# Altium PCB Kaplan.PcbDoc
Units mm, origin at the board's own origin, x right, y up, seen from the top; angles counter-clockwise.
Board outline 50 x 50 mm, 2 copper layers (Top Layer, Bottom Layer), stack 1.071 mm thick; 2 components, 0 nets, 209 pads, 0 vias.
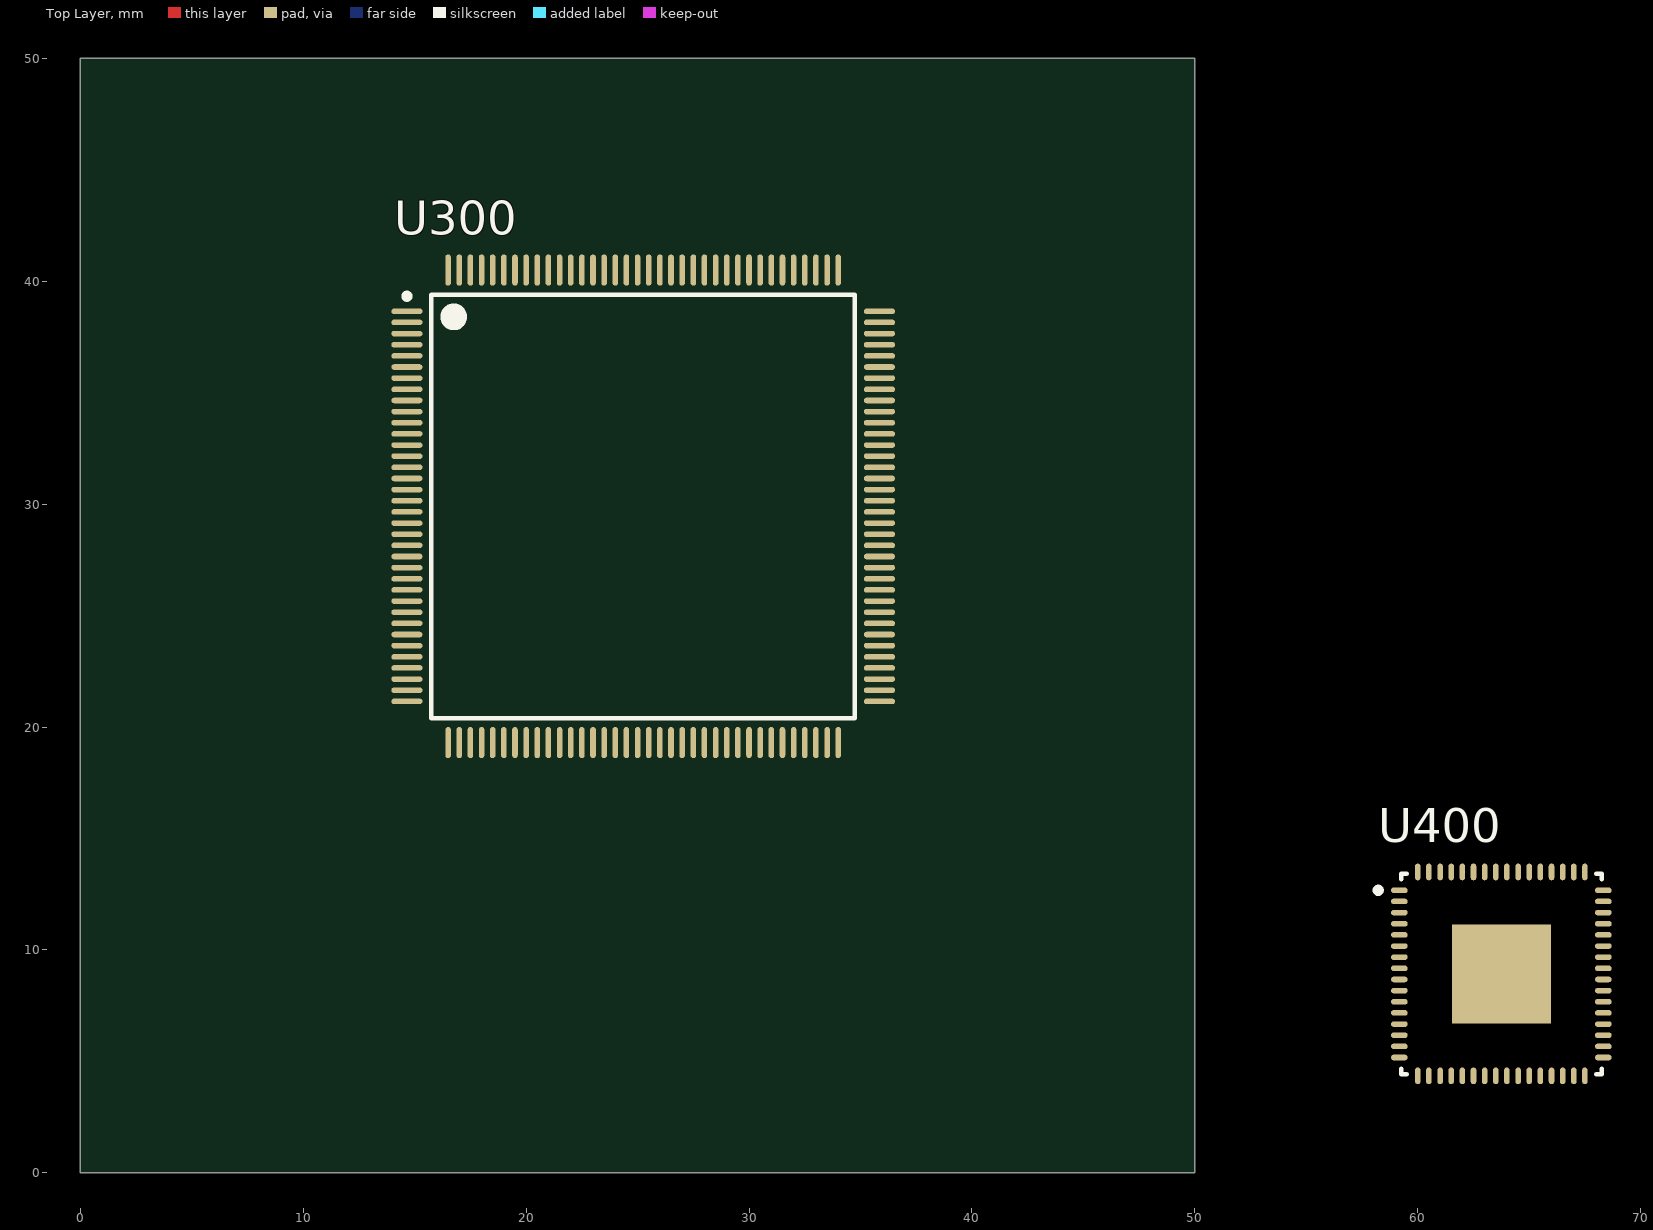
[diagram p0: Top Layer view]
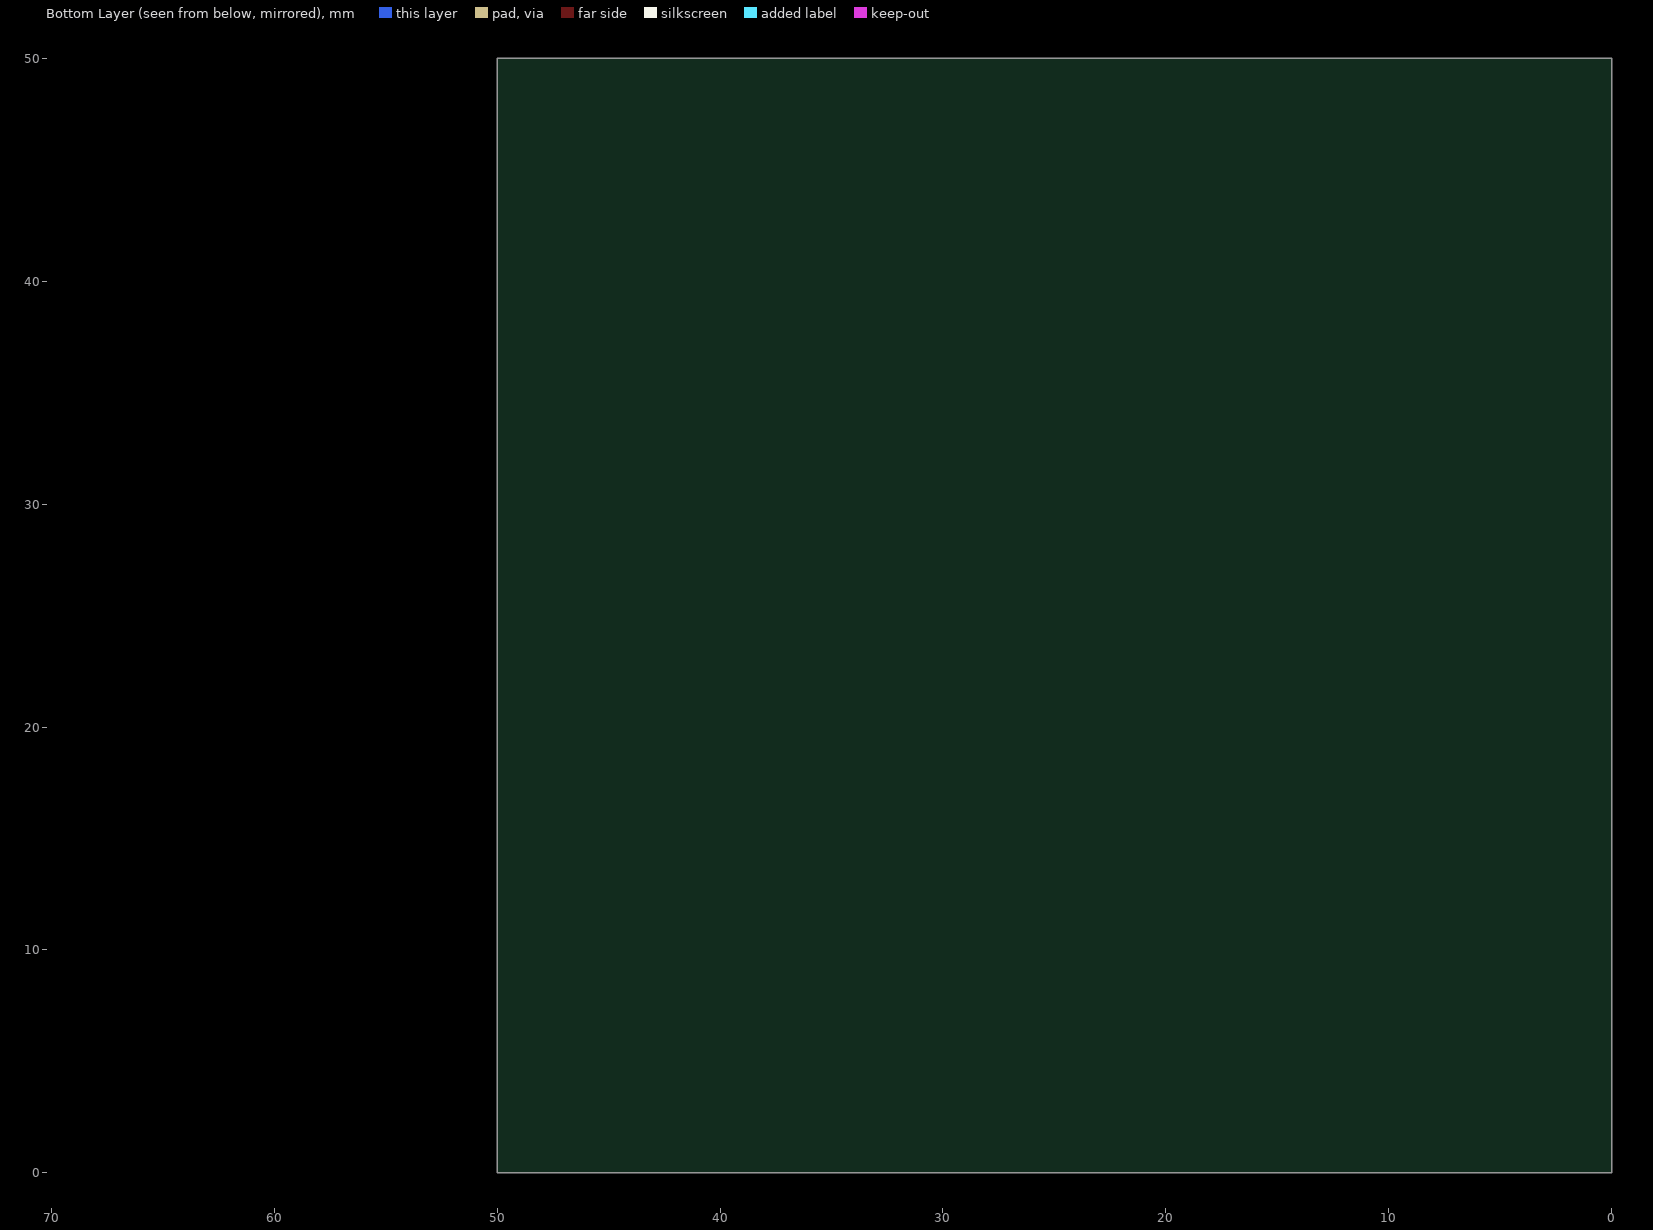
[diagram p1: Bottom Layer view, seen from below]

## Layer stack, top to bottom
Top Solder: solder mask 0.0102, Solder Resist, Dk 3.5
Top Layer: signal copper 0.0356
Dielectric1: core 1, FR-4, Dk 4.8
Bottom Layer: signal copper 0.0356
Bottom Solder: solder mask 0.0102, Solder Resist, Dk 3.5

## Board outline
0,0 0,50 50,50 50,0

## Design rules (kind name [scope] priority, off if disabled: settings)
AssemblyTestPointUsage [All] p1 off:
AssemblyTestpoint [All] p1 off: testpointundercomponent=TRUE minsize=1.016 maxsize=2.54 preferedsize=1.524 minholesize=0 maxholesize=1.016 preferedholesize=0.813 testpointgrid=0.025 usegrid=TRUE gridtolerance=0 allowsidetop=TRUE allowsidebottom=TRUE
BoardOutlineClearance [All] p1: gap=0.2 ignorepadtopadclearanceinfootprint=FALSE
Clearance Clearance_Polygon [InNamedPolygon('Top-GND') vs not (istrack and OnLayer('Keep-Out Layer'))] p1: gap=0.254 ignorepadtopadclearanceinfootprint=FALSE except(0: Arc-Hole Track-Hole SMDPad-Hole THPad-Hole Via-Hole Fill-Hole Poly-Hole Region-Hole Text-Hole)
Clearance [All] p2: gap=0.15 ignorepadtopadclearanceinfootprint=FALSE except(0: Arc-Hole Track-Hole SMDPad-Hole THPad-Hole Via-Hole Fill-Hole Poly-Hole Region-Hole Text-Hole)
ComponentClearance [All] p1 off: gap=0.254 collisioncheckmode=3 verticalgap=0.254 showdistances=FALSE
FabricationTestPointUsage [All] p1 off: valid=0 allowmultiple=FALSE
FabricationTestpoint [All] p1 off: side=3 testpointundercomponent=TRUE minsize=1.016 maxsize=2.54 preferedsize=1.524 minholesize=0 maxholesize=1.016 preferedholesize=0.813 testpointgrid=0.025 allowsidetop=TRUE allowsidebottom=TRUE usegrid=TRUE gridtolerance=0
HoleSize [All] p1: absolutevalues=TRUE maxlimit=5 minlimit=0.2 maxpercent=80.000 minpercent=20.000
HoleToHoleClearance [All] p1: gap=0.2 allowstackedmicrovias=TRUE
MinimumSolderMaskSliver [All] p1 off: minsoldermaskwidth=0.1
PolygonConnect Polygon_Via [isvia] p1: connectstyle=Direct reliefconductorwidth=0.254 reliefentries=4 polygonreliefangle="90 Angle" airgapwidth=0.254
PolygonConnect [All] p2: connectstyle=Relief reliefconductorwidth=0.254 reliefentries=4 polygonreliefangle="90 Angle" airgapwidth=0.254
RoutingVias [All] p1: holewidth=0.2 width=0.45 viastyle="Through Hole" minholewidth=0.2 minwidth=0.45 maxholewidth=0.8 maxwidth=1
SilkToSilkClearance [All] p1 off: silktosilkclearance=0.254
SilkToSolderMaskClearance SilkscreenOverComponentPads [IsPad] p1 off: minsilkscreentomaskgap=0.254 clearancetoexposedcopper=TRUE
SolderMaskExpansion [All] p1: expansion=0.1 istentingtop=FALSE
Width [All] p1: maxlimit=5 minlimit=0.15 preferedwidth=0.2
20 further rules are at their usual default settings.

## Classes and differential pairs
component class "Lattice FPGA": U300
component class "USB Flash": U400

## Components (designator, comment, footprint, x,y, rotation, side; value= is the part's Value field where it differs from the comment)
U300 "ICE40HX1K-TQ144" LATC-TQFP-144_L 25.25,29.9 r0 top
U400 "FT2232HQ-Reel" FP-FT2232HQ-Reel-MFG 63.75,8.925 r0 top

## Footprints (in the part's own frame and the unit in brackets; to place one, negate y for a bottom-side part, rotate by r counter-clockwise, add the part's x,y. Pads: shape width x height; smd on the part's side, far side on the other; paste and mask are expansions set on the pad)
FP-FT2232HQ-Reel-MFG [mm]
  rrect100% 0.75x0.25 smd paste+0 mask+0: 1(-4.575,3.75) 2(-4.575,3.25) 3(-4.575,2.75) 4(-4.575,2.25) 5(-4.575,1.75) 6(-4.575,1.25) 7(-4.575,0.75) 8(-4.575,0.25) 9(-4.575,-0.25) 10(-4.575,-0.75) 11(-4.575,-1.25) 12(-4.575,-1.75) 13(-4.575,-2.25) 14(-4.575,-2.75) 15(-4.575,-3.25) 16(-4.575,-3.75) 33(4.575,-3.75) 34(4.575,-3.25) 35(4.575,-2.75) 36(4.575,-2.25) 37(4.575,-1.75) 38(4.575,-1.25) 39(4.575,-0.75) 40(4.575,-0.25) 41(4.575,0.25) 42(4.575,0.75) 43(4.575,1.25) 44(4.575,1.75) 45(4.575,2.25) 46(4.575,2.75) 47(4.575,3.25) 48(4.575,3.75)
  rrect100% 0.25x0.75 smd paste+0 mask+0: 17(-3.75,-4.575) 18(-3.25,-4.575) 19(-2.75,-4.575) 20(-2.25,-4.575) 21(-1.75,-4.575) 22(-1.25,-4.575) 23(-0.75,-4.575) 24(-0.25,-4.575) 25(0.25,-4.575) 26(0.75,-4.575) 27(1.25,-4.575) 28(1.75,-4.575) 29(2.25,-4.575) 30(2.75,-4.575) 31(3.25,-4.575) 32(3.75,-4.575) 49(3.75,4.575) 50(3.25,4.575) 51(2.75,4.575) 52(2.25,4.575) 53(1.75,4.575) 54(1.25,4.575) 55(0.75,4.575) 56(0.25,4.575) 57(-0.25,4.575) 58(-0.75,4.575) 59(-1.25,4.575) 60(-1.75,4.575) 61(-2.25,4.575) 62(-2.75,4.575) 63(-3.25,4.575) 64(-3.75,4.575)
  rect 4.45x4.45 smd paste+0 mask+0: 65(0,0)
  silkscreen extent -5.65,-4.5 4.5,4.5, body extent -5.05,-5.05 5.05,5.05, height 0.25
LATC-TQFP-144_L [mm] "QFP, 144-Leads, Body 20x20mm, Pitch 0.5mm, IPC High Density"
  oval 1.4x0.25 smd: 1(-10.6,8.75) 2(-10.6,8.25) 3(-10.6,7.75) 4(-10.6,7.25) 5(-10.6,6.75) 6(-10.6,6.25) 7(-10.6,5.75) 8(-10.6,5.25) 9(-10.6,4.75) 10(-10.6,4.25) 11(-10.6,3.75) 12(-10.6,3.25) 13(-10.6,2.75) 14(-10.6,2.25) 15(-10.6,1.75) 16(-10.6,1.25) 17(-10.6,0.75) 18(-10.6,0.25) 19(-10.6,-0.25) 20(-10.6,-0.75) 21(-10.6,-1.25) 22(-10.6,-1.75) 23(-10.6,-2.25) 24(-10.6,-2.75) 25(-10.6,-3.25) 26(-10.6,-3.75) 27(-10.6,-4.25) 28(-10.6,-4.75) 29(-10.6,-5.25) 30(-10.6,-5.75) 31(-10.6,-6.25) 32(-10.6,-6.75) 33(-10.6,-7.25) 34(-10.6,-7.75) 35(-10.6,-8.25) 36(-10.6,-8.75) 73(10.6,-8.75) 74(10.6,-8.25) 75(10.6,-7.75) 76(10.6,-7.25) 77(10.6,-6.75) 78(10.6,-6.25) 79(10.6,-5.75) 80(10.6,-5.25) 81(10.6,-4.75) 82(10.6,-4.25) 83(10.6,-3.75) 84(10.6,-3.25) 85(10.6,-2.75) 86(10.6,-2.25) 87(10.6,-1.75) 88(10.6,-1.25) 89(10.6,-0.75) 90(10.6,-0.25) 91(10.6,0.25) 92(10.6,0.75) 93(10.6,1.25) 94(10.6,1.75) 95(10.6,2.25) 96(10.6,2.75) 97(10.6,3.25) 98(10.6,3.75) 99(10.6,4.25) 100(10.6,4.75) 101(10.6,5.25) 102(10.6,5.75) 103(10.6,6.25) 104(10.6,6.75) 105(10.6,7.25) 106(10.6,7.75) 107(10.6,8.25) 108(10.6,8.75)
  oval 0.25x1.4 smd: 37(-8.75,-10.6) 38(-8.25,-10.6) 39(-7.75,-10.6) 40(-7.25,-10.6) 41(-6.75,-10.6) 42(-6.25,-10.6) 43(-5.75,-10.6) 44(-5.25,-10.6) 45(-4.75,-10.6) 46(-4.25,-10.6) 47(-3.75,-10.6) 48(-3.25,-10.6) 49(-2.75,-10.6) 50(-2.25,-10.6) 51(-1.75,-10.6) 52(-1.25,-10.6) 53(-0.75,-10.6) 54(-0.25,-10.6) 55(0.25,-10.6) 56(0.75,-10.6) 57(1.25,-10.6) 58(1.75,-10.6) 59(2.25,-10.6) 60(2.75,-10.6) 61(3.25,-10.6) 62(3.75,-10.6) 63(4.25,-10.6) 64(4.75,-10.6) 65(5.25,-10.6) 66(5.75,-10.6) 67(6.25,-10.6) 68(6.75,-10.6) 69(7.25,-10.6) 70(7.75,-10.6) 71(8.25,-10.6) 72(8.75,-10.6) 109(8.75,10.6) 110(8.25,10.6) 111(7.75,10.6) 112(7.25,10.6) 113(6.75,10.6) 114(6.25,10.6) 115(5.75,10.6) 116(5.25,10.6) 117(4.75,10.6) 118(4.25,10.6) 119(3.75,10.6) 120(3.25,10.6) 121(2.75,10.6) 122(2.25,10.6) 123(1.75,10.6) 124(1.25,10.6) 125(0.75,10.6) 126(0.25,10.6) 127(-0.25,10.6) 128(-0.75,10.6) 129(-1.25,10.6) 130(-1.75,10.6) 131(-2.25,10.6) 132(-2.75,10.6) 133(-3.25,10.6) 134(-3.75,10.6) 135(-4.25,10.6) 136(-4.75,10.6) 137(-5.25,10.6) 138(-5.75,10.6) 139(-6.25,10.6) 140(-6.75,10.6) 141(-7.25,10.6) 142(-7.75,10.6) 143(-8.25,10.6) 144(-8.75,10.6)
  silkscreen extent -10.72,-9.5 9.5,9.55, body extent -10,-10 10,10, height 1.6

## Part data
U300: library part CMP-0962-00009-1, "iCE40 HX1K Series FPGA Family, 1280 Logic Cells, 1.2 V Core, 64 K Embedded RAM Bits, 144-pin TQFP, Pb-Free, Tray", Manufacturer="Lattice Semiconductor", Supply Voltage=1.2V, ComponentLink1Description="Manufacturer URL", ComponentLink1URL=http://www.latticesemi.com/en, ComponentLink2Description=Datasheet, ComponentLink2URL=http://www.latticesemi.com/~/media/Documents/DataSheets/iCE/iCE40LPHXFamilyDataSheet.pdf, ComponentLink3Description="Package Specification", ComponentLink3URL=http://www.latticesemi.com/lit/docs/package/pkg.pdf, DatasheetVersion="Rev. 02.9", Embedded RAM Bits=64K, Logic Cells=1280, Mounting Technology="Surface Mount", PackageDescription="144-Pin Thin Quad Flat Package, Body 20 x 20 mm, Pitch 0.5 mm", PackageReference=TQFP-144, PackageVersion="Rev. 03.9, 02/2013", Packing=Tray, PartNumber=ICE40HX1K-TQ144, Phase-Locked Loops=1, RoHS=TRUE
U400: library part CMP-0078-00004-5, "IC USB HS DUAL UART/FIFO 64-QFN", Ambient Temperature Range High=+85°C, Ambient Temperature Range Low=-40°C, Manufacturer=FTDI, Max Supply Voltage=3.63V, Min Supply Voltage=1.62V, Nominal Supply Current=5-70mA, Package=QFN64, Temperature="-40°C to +85°C", Automotive=No, Category=IC, Ciiva Ids=1315829, ComponentLink2Description=Datasheet, ComponentLink2URL=https://www.ftdichip.com/Support/Documents/DataSheets/ICs/DS_FT2232H.pdf, Data Rate=480Mbits/s, Device Class L1="Integrated Circuits (ICs)", Device Class L2="Interface ICs", Device Class L3="USB Interface ICs", Digikey Description="IC USB HS DUAL UART/FIFO 64-QFN", Footprint Url=https://www.ftdichip.com/Support/Documents/TechnicalNotes/TN_166%20FTDI%20Example%20IC%20PCB%20Footprints.pdf, Height=0.9mm, Import Ts=1521843541, Interface=I2C,SPI,UART,USB,RS-232,RS-485,RS-422,Other, Ipc Land Pattern Name=QFN50P900X900X85-64, Lead Free=Yes, Manufacturer Part Number=FT2232HQ-Reel, Mouser Description="USB Interface IC USB HS to Dual UART/ FIFO/SPI/JTAG/I2C", Number Of Ports=1, Octopart=https://octopart.com/ft2232hq-reel-ftdi-19172126, Release Date=1383921489, RoHS=TRUE, Standoff Height=0mm, Temperature Range High=+85°C, Temperature Range Low=-40°C, Usb Standard="USB 2.0"

## Nets (pads, with @x,y where several pads share a name; then routed paths per layer and width w, separated by ;. In a path a pad name is that pad's centre, name@x,y a point inside that pad or via, vN(x,y) a via of type N, cw(c..) or ccw(c..) an arc to the next point about the centre after c; other vN are vias at no path point)
pads on no net: U300.1 U300.2 U300.3 U300.4 U300.5 U300.6 U300.7 U300.8 U300.9 U300.10 U300.11 U300.12 U300.13 U300.14 U300.15 U300.16 U300.17 U300.18 U300.19 U300.20 U300.21 U300.22 U300.23 U300.24 U300.25 U300.26 U300.27 U300.28 U300.29 U300.30 U300.31 U300.32 U300.33 U300.34 U300.35 U300.36 U300.37 U300.38 U300.39 U300.40 U300.41 U300.42 U300.43 U300.44 U300.45 U300.46 U300.47 U300.48 U300.49 U300.50 U300.51 U300.52 U300.53 U300.54 U300.55 U300.56 U300.57 U300.58 U300.59 U300.60 U300.61 U300.62 U300.63 U300.64 U300.65 U300.66 U300.67 U300.68 U300.69 U300.70 U300.71 U300.72 U300.73 U300.74 U300.75 U300.76 U300.77 U300.78 U300.79 U300.80 U300.81 U300.82 U300.83 U300.84 U300.85 U300.86 U300.87 U300.88 U300.89 U300.90 U300.91 U300.92 U300.93 U300.94 U300.95 U300.96 U300.97 U300.98 U300.99 U300.100 U300.101 U300.102 U300.103 U300.104 U300.105 U300.106 U300.107 U300.108 U300.109 U300.110 U300.111 U300.112 U300.113 U300.114 U300.115 U300.116 U300.117 U300.118 U300.119 U300.120 U300.121 U300.122 U300.123 U300.124 U300.125 U300.126 U300.127 U300.128 U300.129 U300.130 U300.131 U300.132 U300.133 U300.134 U300.135 U300.136 U300.137 U300.138 U300.139 U300.140 U300.141 U300.142 U300.143 U300.144 U400.1 U400.2 U400.3 U400.4 U400.5 U400.6 U400.7 U400.8 U400.9 U400.10 U400.11 U400.12 U400.13 U400.14 U400.15 U400.16 U400.17 U400.18 U400.19 U400.20 U400.21 U400.22 U400.23 U400.24 U400.25 U400.26 U400.27 U400.28 U400.29 U400.30 U400.31 U400.32 U400.33 U400.34 U400.35 U400.36 U400.37 U400.38 U400.39 U400.40 U400.41 U400.42 U400.43 U400.44 U400.45 U400.46 U400.47 U400.48 U400.49 U400.50 U400.51 U400.52 U400.53 U400.54 U400.55 U400.56 U400.57 U400.58 U400.59 U400.60 U400.61 U400.62 U400.63 U400.64 U400.65

## Silkscreen, mask and mechanical layers (free items; w line width, h text height)
Top Solder:
  text ".PCBNumber" at 3,2.5 h1.52
BoardOutline:
  the board outline again, w0.1
LayerStack:
  drawing of 191 lines, arcs and shapes, not listed
  text "Layer" at 2.251,78.858 h1.52
  text "Name" at 12.662,78.858 h1.52
  text "Material" at 36.278,78.858 h1.52
  text "Thickness" at 58.116,78.858 h1.52
  text "Constant" at 74.622,78.858 h1.52
  text "Board Layer Stack" at 89.096,78.858 h1.52
  text "Top Overlay" at 12.662,75.81 h1.52
  text "Top Solder" at 12.662,72.762 h1.52
  text "Solder Resist" at 36.278,72.762 h1.52
  text "0,010mm" at 58.116,72.762 h1.52
  text "3.5" at 74.622,72.762 h1.52
  text "1" at 2.251,69.714 h1.52
  text "Top Layer" at 12.662,69.714 h1.52
  text "0,036mm" at 58.116,69.714 h1.52
  text "Dielectric1" at 12.662,66.666 h1.52
  text "FR-4" at 36.278,66.666 h1.52
  text "1,000mm" at 58.116,66.666 h1.52
  text "4.8" at 74.622,66.666 h1.52
  text "2" at 2.251,63.618 h1.52
  text "Bottom Layer" at 12.662,63.618 h1.52
  text "0,036mm" at 58.116,63.618 h1.52
  text "Bottom Solder" at 12.662,60.57 h1.52
  text "Solder Resist" at 36.278,60.57 h1.52
  text "0,010mm" at 58.116,60.57 h1.52
  text "3.5" at 74.622,60.57 h1.52
  text "Bottom Overlay" at 12.662,57.522 h1.52

## Dimensions
0,0 to 50,0 on TopDimensions
50,0 to 50,50 on TopDimensions